# Allegro board LAYOUT.brd
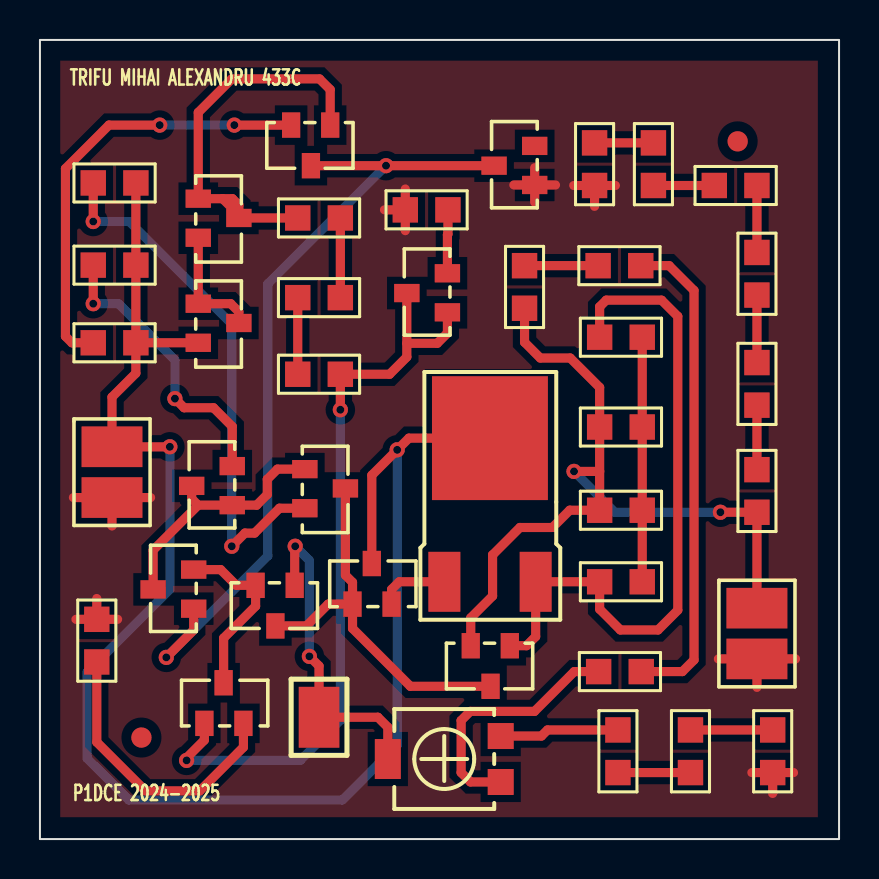
[diagram p0: board, top side]
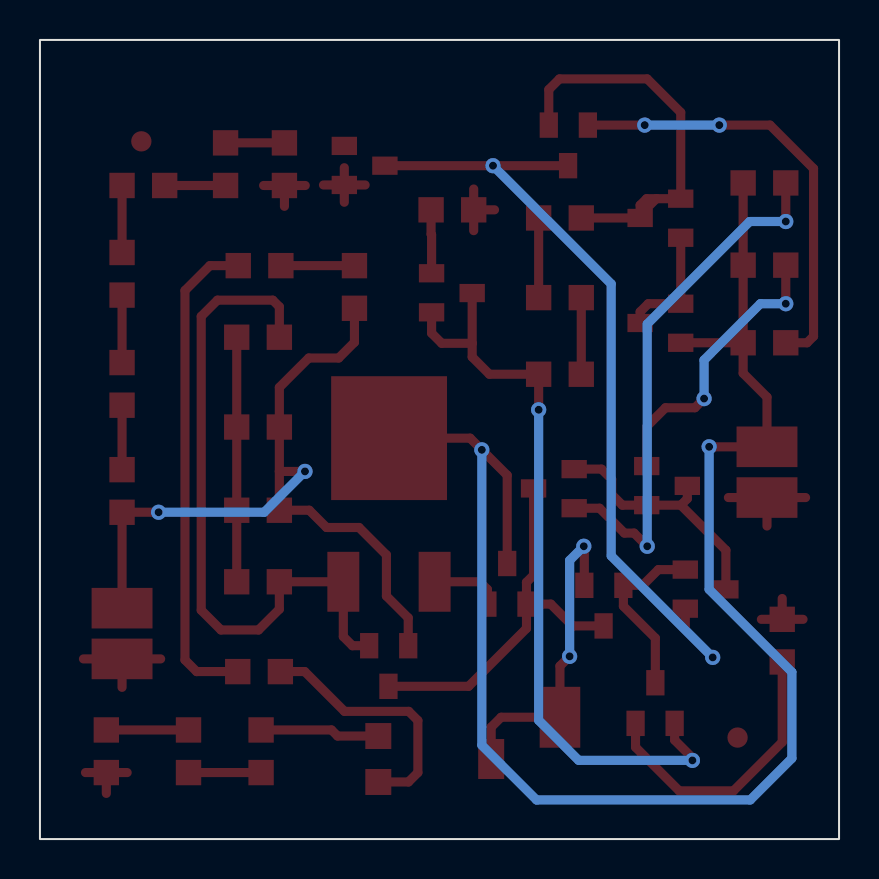
[diagram p1: board, bottom side, seen from below]

Outline 40 x 40 mm; copper layers: TOP, BOTTOM. Coordinates in mm from the lower left corner of the outline.
Outline path: rectangle 0,0 40,40

## Placement (name value [footprint] x y rotation side)
D6  BZX84-C5V1  [TO236]  24.64 32.74 0 top
J1  CON1  [J1]  13.97 6.1 0 top
NOREF  -  []  0 0 0 top
NOREF#2  -  []  0 0 90 top
NOREF#3  -  []  40 0 90 top
NOREF#4  -  []  0 40 0 top
NOREF#5  -  [unnamed#2]  34.92 34.92 0 top
NOREF#6  -  [unnamed#2]  5.08 5.08 0 top
P1  10k  [TS53YL]  23.06 5.16 0 top
Q1  QBC807-25  [TO236]  9.5 16.71 0 top
Q2  QBC817-25  [TO236]  7.57 11.53 0 top
Q3  QBC817-25  [TO236]  12.75 12.57 90 top
Q4  QBC807-25  [TO236]  13.39 18.52 180 top
Q5  QBC817-25  [TO236]  8.23 5.92 270 top
Q19  QBC807-25  [TO236]  14.53 35.61 90 top
Q22  QBC807-25  [TO236]  8.05 26.8 180 top
Q23  QBC807-25  [TO236]  8.05 32.05 180 top
Q24  QBC817-25  [TO236]  20.27 26.37 0 top
QESR  QBC846B  [TO236]  15.65 11.89 270 top
QESR2  QMJD31C  [DPACK]  20.24 12.88 0 top
QSARCINA  QBC817-25  [TO236]  23.52 9.55 90 top
R2  220  [SMR0805]  2.67 24.84 0 top
R6  2.2k  [SMR0805]  24.26 26.57 90 top
R8  220  [SMR0805]  2.84 8.86 90 top
R9  4.7k  [SMR0805]  32.56 3.33 90 top
R10  100  [SMR0805]  2.67 28.73 0 top
R11  100  [SMR0805]  2.67 32.84 0 top
R12  2.2k  [SMR0805]  27.94 28.7 0 top
R27  1k  [SMR0805]  12.9 31.09 0 top
R28  1k  [SMR0805]  15.04 27.1 180 top
R29  1k  [SMR0805]  12.9 23.27 0 top
R30  220  [SMR0805]  20.42 31.5 180 top
R34  2.7K  [SMR0805]  36.68 5.46 270 top
R37  1k  [SMR0805]  30.1 8.38 180 top
R38  150  [SMR0805]  28.93 5.46 270 top
RC1  1  [SMR0805]  28.02 12.88 0 top
RC2  0.47  [SMR0805]  30.15 16.46 180 top
RC3  0.47  [SMR0805]  30.15 20.62 180 top
RC4  0.47  [SMR0805]  28.02 25.12 0 top
RLOAD  100  [SMR0805]  35.89 16.36 90 top
RLOAD1  100  [SMR0805]  35.89 21.72 90 top
RLOAD2  100  [SMR0805]  35.89 27.23 90 top
RLOAD3  100  [SMR0805]  35.89 32.72 180 top
RLOAD4  100  [SMR0805]  30.71 32.72 90 top
RLOAD5  51  [SMR0805]  27.76 34.85 270 top
VIN  CON2  [JUMPER2]  3.61 19.63 270 top
VO  CON2  [JUMPER2]  35.89 11.56 270 top

## Library data of the parts
D6 = BZX84-C5V1_0
J1 = CON1
P1 = POT
Q1 Q4 Q19 Q22 Q23 = QBC807-25_0
Q2 Q3 Q5 Q24 QSARCINA = QBC817-25_0
QESR = QBC846B_0
QESR2 = QMJD31C_0
R2 R6 R8-R12 R27-R30 R34 R37 R38 RC1-RC4 RLOAD RLOAD1-RLOAD5 = R
VIN VO = CON2: User Part Number: ***

## Footprints (pads in the part's own frame, mm; a bottom-side part is the same pattern mirrored in y, then rotated)
DPACK
  rect 1.6x3 smd: 1(0,0) 3(4.57,0)
  rect 5.8x6.2 smd: 2(2.28,7.19)
J1
  rect 2.032x3.048 smd: 1(0,0)
JUMPER2
  rect 2.032x3.048 smd: 1(0,0) 2(2.54,0)
SMR0805
  rect 1.27x1.27 smd: 1(0,0) 2(2.134,0)
TO236
  rect 1.27x0.914 smd: 1(0.127,0) 2(0.127,1.956) 3(-1.905,0.965)
TS53YL
  rect 1.3x1.3 smd: 1(0,0) 3(0,-2.3)
  rect 1.3x2 smd: 2(-5.65,-1.15)
unnamed#2
  round 1.016 smd: (0,0)

## Nets
0: D6.1 R8.2 R30.2 R34.2 RLOAD5.2 VIN.2 VO.2
OUT: QSARCINA.2 R6.1 RC2.2 RC3.2 RLOAD.1 VO.1
N189993: RC1.2 RC2.1 RC3.1 RC4.2
N190031: J1.1 P1.2(T) Q3.1
N190037: Q3.3 Q4.3 QESR.1 QSARCINA.3
N190043: Q22.2 QESR.3 QESR2.2 R2.2 R10.2 R11.2 VIN.1
N190053: D6.3 Q2.1 Q19.3
N190123: P1.3(2) R37.2
N190177: Q19.1 Q23.1 Q23.3 R27.1
N190183: Q19.2 R2.1
N190243: R6.2 R12.1
N190249: R12.2 R37.1
N190259: QESR2.3 QSARCINA.1 RC1.1 RC4.1
N190293: QESR.2 QESR2.1
N190443: RLOAD.2 RLOAD1.1
N190471: RLOAD1.2 RLOAD2.1
N190499: RLOAD2.2 RLOAD3.1
N190505: RLOAD3.2 RLOAD4.1
N190555: RLOAD4.2 RLOAD5.1
N191139: Q1.2 R10.1
N191145: Q4.2 R11.1
N191181: Q1.1 Q1.3 Q2.3 Q4.1
N191189: Q2.2 Q3.2 Q5.3
N191237: Q5.2 R8.1
N191301: P1.1 R38.1
N191307: R9.2 R34.1
N191395: Q22.1 Q22.3 Q23.2
N191501: R28.2 R29.1
N191507: R27.2 R28.1
N191573: Q5.1 Q24.1 Q24.3 R29.2
N191613: Q24.2 R30.1
N191649: R9.1 R38.2

Pads without a net: D6 2

## Via types
v1: diameter 0.762, hole 0.4, TOP to BOTTOM, 16 vias

## Routing (per net, layer and track width the routed paths; a pad name or vN(x,y) marks a point on that pad's centre or on a via; arc(x,y) is an arc through that point)
0: length 26.9
  TOP w0.457: R34.2 37.72,3.33 ; R34.2 35.64,3.33 ; R34.2 36.68,2.29 ; D6.1 24.77,33.6 ; D6.1 23.72,32.74 ; D6.1 25.81,32.74 ; D6.1 24.77,31.88 ; 18.29,30.45 R30.2 ; R30.2 17.25,31.5 ; R30.2 18.29,32.54 ; VO.2 37.82,9.02 ; VO.2 35.89,7.59 ; VO.2 33.96,9.02 ; R8.2 3.89,11 ; R8.2 2.84,12.04 ; R8.2 1.8,11 ; 27.76,31.67 RLOAD5.2 ; RLOAD5.2 26.72,32.72 ; RLOAD5.2 28.8,32.72 ; 3.61,15.67 VIN.2 ; VIN.2 5.54,17.09 ; VIN.2 1.68,17.09
OUT: length 39.9
  TOP w0.457: VO.1 RLOAD.1 v1(34.06,16.36) ; 28.02,18.4 RC3.2 28.02,22.61 26.54,24.08 25.04,24.08 24.26,24.87 R6.1 ; 28.02,18.4 v1(26.73,18.4) ; 28.02,18.4 RC2.2 26.52,16.46 25.65,15.6 24.03,15.6 22.66,14.22 22.66,12.16 21.56,11.07 QSARCINA.2
  BOTTOM w0.457: v1(26.73,18.4) 28.78,16.36 v1(34.06,16.36)
N189993: length 12.2
  TOP w0.457: RC1.2 RC2.1 RC3.1 RC4.2
N190031: length 16.3
  TOP w0.457: v1(12.78,14.66) 12.75,14.63 Q3.1 ; v1(13.49,9.14) 13.97,8.66 J1.1 16.92,6.1 17.41,5.6 P1.2
  BOTTOM w0.457: v1(13.49,9.14) 13.49,13.94 v1(12.78,14.66)
N190037: length 19.6
  TOP w0.457: QESR.1 15.65,12.85 15.29,13.21 Q4.3 ; QESR.1 15.65,10.54 18.54,7.65 QSARCINA.3 ; QESR.1 14.43,11.76 13.34,10.67 Q3.3
N190043: length 80.4
  TOP w0.457: R2.2 R10.2 R11.2 ; R2.2 Q22.2 ; R2.2 4.8,23.32 3.61,22.12 VIN.1 v1(6.5,19.63) ; QESR.3 16.61,18.21 v1(17.88,19.48) 18.47,20.07 QESR2.2
  BOTTOM w0.457: v1(17.88,19.48) 17.88,4.7 15.14,1.96 4.45,1.96 2.36,4.04 2.36,8.36 6.5,12.5 v1(6.5,19.63)
N190053: length 41.3
  TOP w0.457: v1(6.32,9.09) 7.7,10.46 Q2.1 ; Q19.3 v1(17.32,33.71) D6.3
  BOTTOM w0.457: v1(17.32,33.71) 11.4,27.79 11.4,14.17 v1(6.32,9.09)
N190123: length 12.7
  TOP w0.457: P1.3 21.55,2.86 21.08,3.33 21.08,5.93 21.54,6.39 24.75,6.39 26.75,8.38 R37.2
N190177: length 20.7
  TOP w0.457: 10.11,31.09 Q23.3 9.96,31.73 9.63,32.05 9.14,32.05 ; 10.11,31.09 9.14,32.05 ; 10.11,31.09 R27.1 ; Q19.1 14.53,37.52 14,38.05 9.6,38.05 7.92,36.37 Q23.1 9.14,32.05
N190183: length 22.1
  TOP w0.457: v1(5.99,35.74) 3.45,35.74 1.28,33.56 1.28,25.16 1.6,24.84 R2.1 ; Q19.2 v1(9.73,35.74)
  BOTTOM w0.457: v1(9.73,35.74) v1(5.99,35.74)
N190243: length 3.7
  TOP w0.457: R6.2 R12.1
N190249: length 24.6
  TOP w0.457: R12.2 31.5,28.7 32.74,27.46 32.74,8.97 32.16,8.38 R37.1
N190259: length 34.2
  TOP w0.457: QSARCINA.1 24.36,9.68 24.81,10.13 QESR2.3 RC1.1 28.02,11.51 29.06,10.46 30.94,10.46 31.93,11.46 31.93,26.16 31.11,26.97 28.35,26.97 28.02,26.64 RC4.1
N190293: length 3.5
  TOP w0.457: QESR.2 17.6,12.5 17.98,12.88 QESR2.1
N190443: length 3.2
  TOP w0.457: RLOAD1.1 RLOAD.2
N190471: length 3.4
  TOP w0.457: RLOAD2.1 RLOAD1.2
N190499: length 3.4
  TOP w0.457: RLOAD3.1 RLOAD2.2
N190505: length 3
  TOP w0.457: RLOAD4.1 RLOAD3.2
N190555: length 2.9
  TOP w0.457: RLOAD4.2 RLOAD5.1
N191139: length 14.5
  TOP w0.457: v1(2.67,26.8) R10.1 ; Q1.2 9.63,20.65 8.69,21.59 7.21,21.59 v1(6.76,22.05)
  BOTTOM w0.457: v1(6.76,22.05) 6.76,23.98 3.94,26.8 v1(2.67,26.8)
N191145: length 26.6
  TOP w0.457: v1(9.6,14.66) 10.26,15.32 10.74,15.32 11.99,16.56 Q4.2 ; R11.1 v1(2.67,30.91)
  BOTTOM w0.457: v1(2.67,30.91) 4.47,30.91 9.6,25.78 v1(9.6,14.66)
N191181: length 12.8
  TOP w0.457: Q1.3 7.59,17.04 7.92,16.71 ; 7.92,16.71 5.66,14.46 Q2.3 ; 7.92,16.71 Q1.1 10.85,16.71 11.38,17.25 11.38,18.01 11.89,18.52 Q4.1
N191189: length 9
  TOP w0.457: Q2.2 9.04,13.49 9.83,12.7 Q3.2 10.79,11.66 9.19,10.06 Q5.3
N191237: length 14.5
  TOP w0.457: Q5.2 10.19,4.6 8,2.41 5.28,2.41 2.84,4.85 R8.1
N191301: length 6
  TOP w0.457: P1.1 25.1,5.16 25.41,5.46 R38.1
N191307: length 4.1
  TOP w0.457: R34.1 R9.2
N191395: length 6.1
  TOP w0.457: Q23.2 Q22.1 9.55,26.8 9.96,26.39 Q22.3
N191501: length 3.8
  TOP w0.457: R29.1 R28.2
N191507: length 4
  TOP w0.457: R28.1 R27.2
N191573: length 38.2
  TOP w0.457: 18.36,24.82 19.89,24.82 20.4,25.32 Q24.1 ; 18.36,24.82 Q24.3 ; 18.36,24.82 18.36,24.13 17.5,23.27 R29.2 v1(15.04,21.49) ; v1(7.34,3.94) 7.34,4.06 8.23,4.95 Q5.1
  BOTTOM w0.457: v1(7.34,3.94) 13.03,3.94 15.04,5.94 v1(15.04,21.49)
N191613: length 3.2
  TOP w0.457: Q24.2 20.4,30.25 20.42,30.28 R30.1
N191649: length 3.6
  TOP w0.457: R9.1 R38.2

## Copper pours and planes (outline as drawn; the poured copper is in the pictures)
0 on TOP: 1.02,38.96 1.02,1.09 38.94,1.09 38.94,38.96 ; 9 cut-outs

## Text on the board
Ref Des/Silkscreen Top: TRIFU MIHAI ALEXANDRU 433C | P1DCE 2024-2025
XSECTION_CHART: *  SURFACE - AIR 0 MIL | L1: TOP CONDUCTOR - COPPER 0.71 MIL | *  DIELECTRIC - FR-4 61.57 MIL | L2: BOTTOM CONDUCTOR - COPPER 0.71 MIL | DESIGN CROSS SECTION CHART | ___________________________ | TOTAL THICKNESS 62.99 MIL | 1-2 | FIGURE | SIZE | 15.74 | DRILL CHART: TOP to BOTTOM | ALL UNITS ARE IN MILS | PLATED | QTY | 16
